# Altium PCB E-28 Voltmeter.PcbDoc
Units mil, origin at the board's own origin, x right, y up, seen from the top; angles counter-clockwise.
Board outline 1944.63 x 1203 mil, 2 copper layers (Top Layer, Bottom Layer); 8 components, 6 nets, 27 pads, 0 vias.
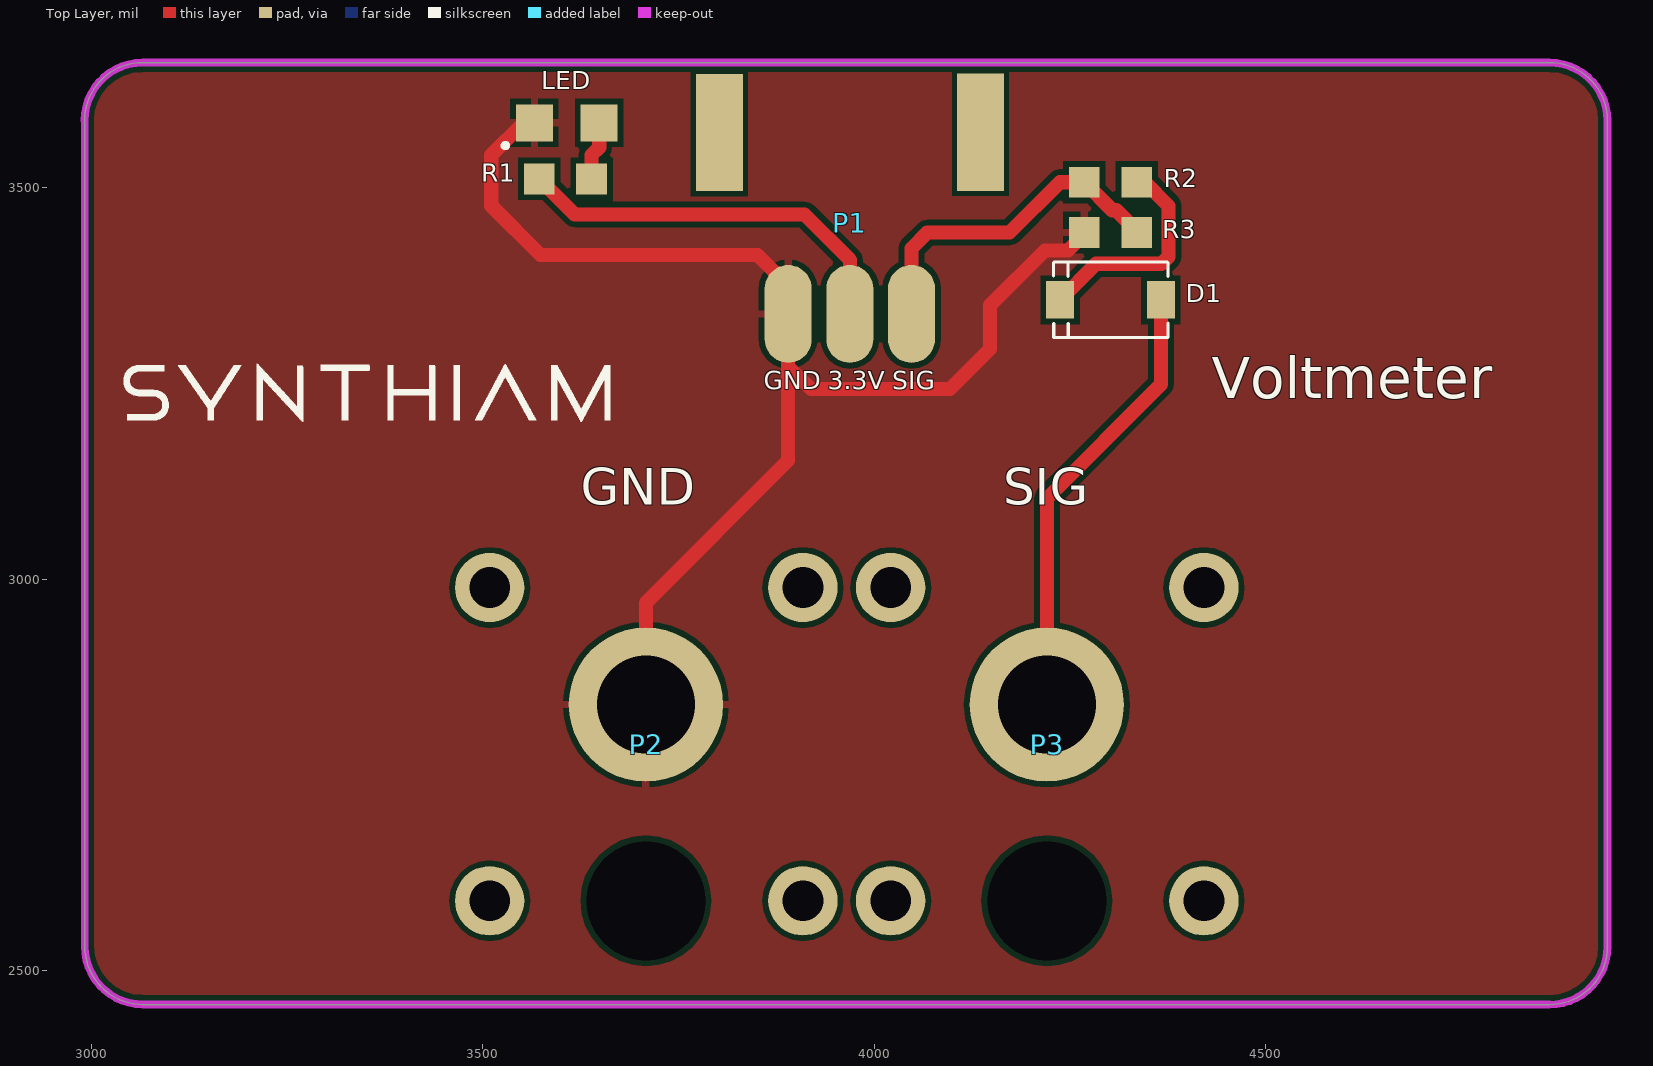
[diagram p0: Top Layer view]
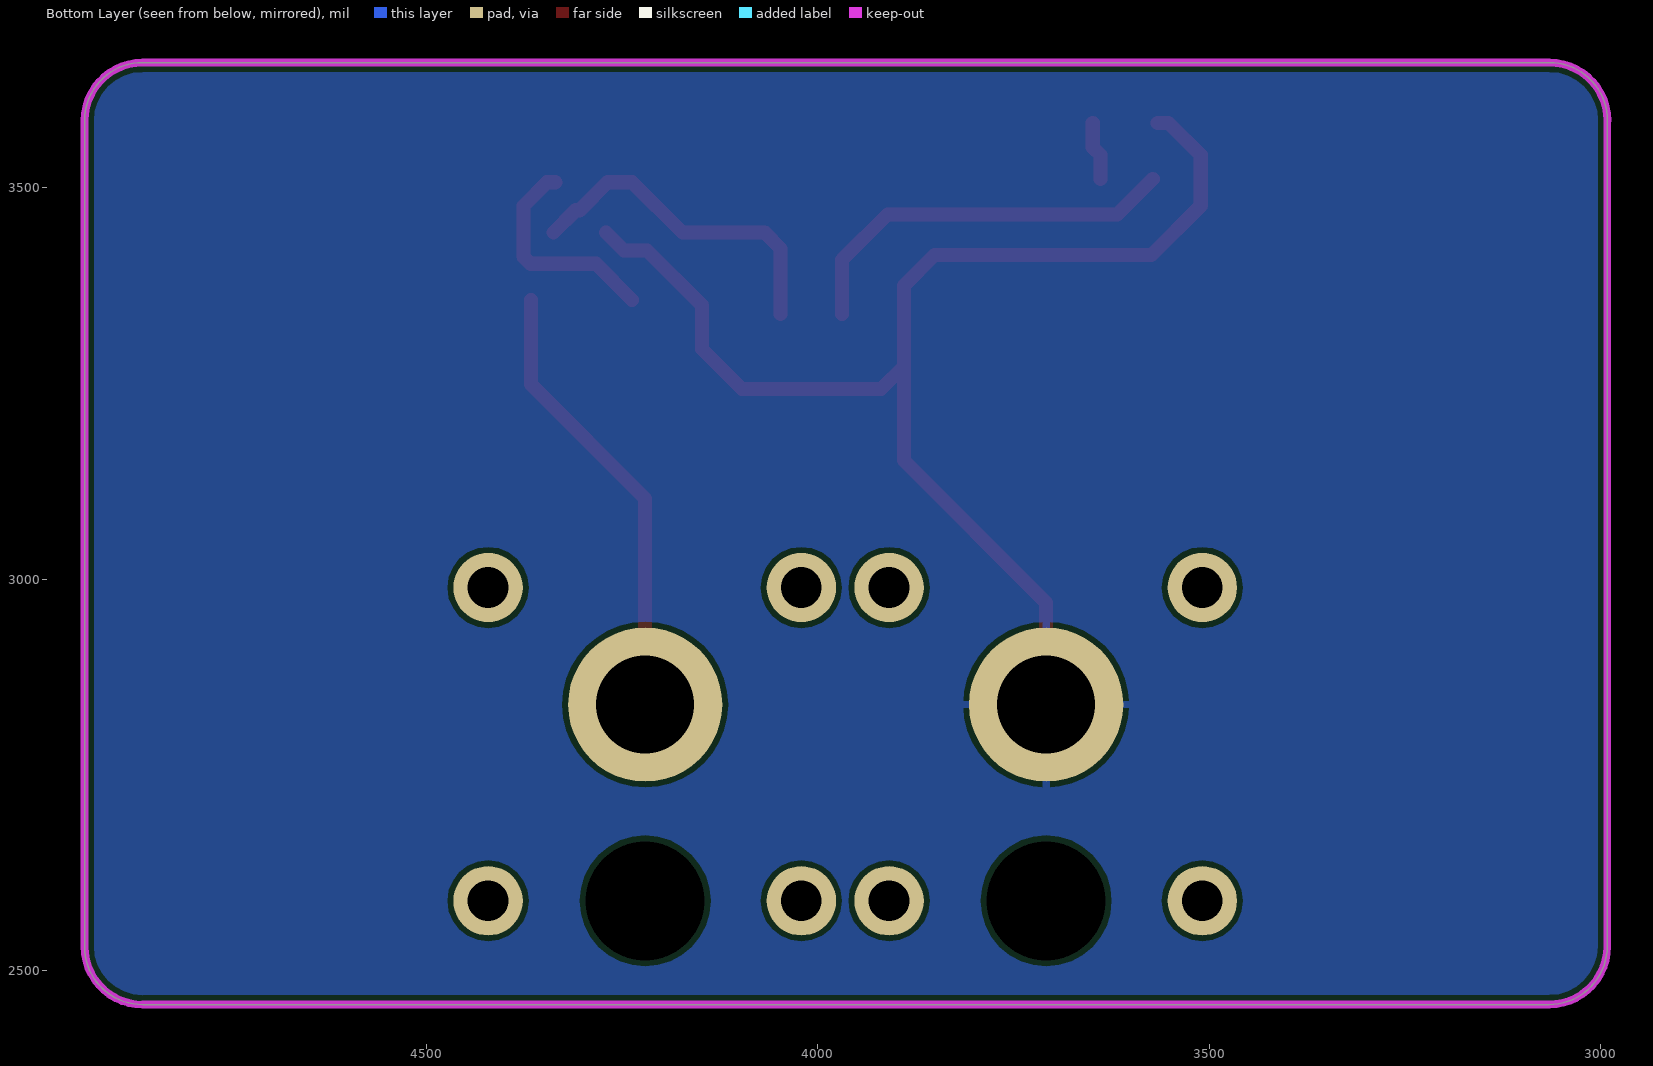
[diagram p1: Bottom Layer view, seen from below]

## Layer stack, top to bottom
Top Layer: signal copper 1.4
Dielectric: dielectric 12.6, FR-4, Dk 4.8
Bottom Layer: signal copper 1.4

## Board outline
2992,2531.5 2992,3585.69 2991.69,3585.69 cw(c3066,3585.69) 3066,3660 4862,3660 cw(c4862,3585.69) 4936.31,3585.69 4936.31,2531.31 cw(c4862,2531.31) 4862,2457 4862,2457.19 3066.31,2457.19 cw(c3066.31,2531.5)

## Design rules (kind name [scope] priority, off if disabled: settings)
Clearance [All] p1: gap=7
PolygonConnect [All] p1: connectstyle=Relief reliefconductorwidth=10 reliefentries=4 polygonreliefangle="90 Angle"
RoutingVias [All] p1: holewidth=28 width=50 viastyle="Through Hole" minholewidth=28 minwidth=50 maxholewidth=28 maxwidth=50
SilkscreenOverComponentPads [All] p1: minsilkscreentomaskgap=10
SolderMaskExpansion [All] p1: expansion=4
Width [All] p1: maxlimit=25 minlimit=7 preferedwidth=18 minimp=50.000000 maximp=50.000000 favimp=50.000000
27 further rules are at their usual default settings.

## Classes and differential pairs
component class "E-28 Voltmeter": D1 LED P2 P3 R1 R2 R3

## Components (designator, comment, footprint, x,y, rotation, side; value= is the part's Value field where it differs from the comment)
D1 "20V 1A" "DIODE SOD-123" 4301.76,3357 r90 top
LED "LED2" "0805 LED - TIGHT" 3580,3583 r180 top (schematic designator PWRLED)
P1 "JST 3-pin" "JST-PH 3-pin SMD" 3969,3455 r0 top
P2 "GND" "Banana Jack RA" 3709,2840 r90 top
P3 "SIG" "Banana Jack RA" 4221,2840 r90 top
R1 "Res1" "0603 tight" 3605.76,3511.39 r180 top
R2 "Res1" "0603 tight" 4301.76,3507.09 r0 top
R3 "Res1" "0603 Tight" 4301.76,3443 r180 top

## Footprints (in the part's own frame and the unit in brackets; to place one, negate y for a bottom-side part, rotate by r counter-clockwise, add the part's x,y. Pads: shape width x height; smd on the part's side, far side on the other; paste and mask are expansions set on the pad)
"0603 tight" [mm]
  rect 1x1 smd: 1(-0.85,0) 2(0.85,0)
"0603 Tight" [mm]
  rect 1x1 smd: 1(-0.85,0) 2(0.85,0)
"0805 LED - TIGHT" [mm] "SMT LED; 2 Flat Leads; Lite-Oon LTST-C170CKT"
  rect 1.2x1.2 smd: 1(-1.75,0) 2(0.35,0)
  silkscreen extent 1.27,0.71 1.32,0.76
"Banana Jack RA" [mm]
  round 2.25 hole 1.321: 0(-6.36,-5.08) 0(-6.36,5.08) 0(3.8,-5.08) 0(3.8,5.08)
  round 5 hole 3.175: 1(0.005,0.015)
"DIODE SOD-123" [mm]
  rect 1.22x0.91 smd: 1(0,-1.635) 2(0,1.635)
  silkscreen extent -1.22,-1.87 1.23,1.86
"JST-PH 3-pin SMD" [mil]
  rect 60x150 smd: 0(-166.71,115.62) 0(166.71,116.02)
  oval 60x125 smd: 1(-78.82,-116.02) 2(-0.08,-116.02) 3(78.66,-116.02)

## Part data
D1: library part "Diode 1N4148", "High Conductance Fast Diode"
LED: library part LED1, "Typical RED GaAs LED"
P1: library part "Header 3", "Header, 3-Pin"
P2 P3: library part "Banana Jack RA"
R1 R2 R3: "Resistor"

## Free pads (board coordinates)
  round 0 hole 152: 0(3708.41,2589.61) 0(4220.41,2589.61)

## Nets (pads, with @x,y where several pads share a name; then routed paths per layer and width w, separated by ;. In a path a pad name is that pad's centre, name@x,y a point inside that pad or via, vN(x,y) a via of type N, cw(c..) or ccw(c..) an arc to the next point about the centre after c; other vN are vias at no path point)
GND: LED.2 P1.1 P2.1 R3.2 | length 1676.7
  Top Layer w18: LED.2 3552,3583 3511,3542 3511,3477.08 3574.08,3414 3851.18,3414 3890.18,3375 P1.1 3890.18,3272 ; P2.1 3708.41,2970.23 3890.18,3152 3890.18,3272 ; R3.2@4270.54,3443 4247.53,3420 4218,3420 4148,3350 4148,3294 4097,3243 3919.18,3243 3890.18,3272
NetD1_1: D1.1 P3.1 | length 577.2
  Top Layer w18: P3.1 4220.41,3103.41 4366.13,3249.13 D1.1
NetD1_2: D1.2 R2.2 | length 279.6
  Top Layer w18: D1.2 4283.39,3403 4367,3403 4376,3412 4376,3477 4345.91,3507.09 R2.2
NetLED_1: LED.1 R1.1 | length 75.6
  Top Layer w18: R1.1 3639.22,3542 3648.9,3551.67 LED.1
NetP1_2: P1.2 R1.2 | length 508.5
  Top Layer w18: R1.2 3617.68,3466 3911,3466 3968.92,3408.08 P1.2
NetP1_3: P1.3 R2.1 R3.1 | length 435
  Top Layer w18: P1.3 4047.66,3422.66 4067.79,3442.79 4172.79,3442.79 4237.09,3507.09 R2.1 4303.98,3471.4 4309.06,3471.4 R3.1@4337.46,3443
pads on no net: P1.0 P2.0 P3.0

## Polygon pours and split planes (outlines as drawn)
GND on Top Layer "Top Layer-GND" (solid, pour order 2): 2999.23,2533.55 3000,3273 3000.23,3584.45 cw(c3074.55,3584.45) 3074.55,3658.77 4857.45,3655.77 cw(c4857.45,3581.45) 4931.77,3581.45 4932,3419 4932,3106 4931.77,2534.55 cw(c4857.45,2534.55) 4857.45,2460.23 4412,2457.19 3073.55,2459.23 cw(c3073.55,2533.55)
GND on Bottom Layer "BTM layer - GND" (solid, pour order 4): 2997.23,2536.55 2998,3350 2995.23,3583.45 cw(c3069.55,3583.45) 3069.55,3657.77 4855.45,3653.77 cw(c4855.45,3579.45) 4929.77,3579.45 4931,3345 4931,2720 4931.77,2533.55 cw(c4857.45,2533.55) 4857.45,2459.23 4412,2457.19 3071.55,2462.23 cw(c3071.55,2536.55)

## Keep-outs
Keep-Out Layer:
  lines w10: 2991.69,3585.69 cw(c3066,3585.69) 3066,3660 4862,3660 cw(c4862,3585.69) 4936.31,3585.69 4936.31,2531.31 cw(c4862,2531.31) 4862,2457 ; 2992,3585.69 2992,2531.5 ccw(c3066.31,2531.5) 3066.31,2457.19 4862,2457.19

## Silkscreen, mask and mechanical layers (free items; w line width, h text height)
Top Overlay:
  drawing of 2260 lines, arcs and shapes, not listed
  text "GND" at 3859,3235 h40
  text "3.3V" at 3941,3235 h40
  text "SIG" at 4023,3235 h40
  text "Voltmeter" at 4431,3214 h90
Bottom Solder:
  text ":)" at 3936.52,3586 h150 r270